# EAGLE board NSE2022_ROCKETCONTROLLER_ver0 (EAGLE 9.6.0)
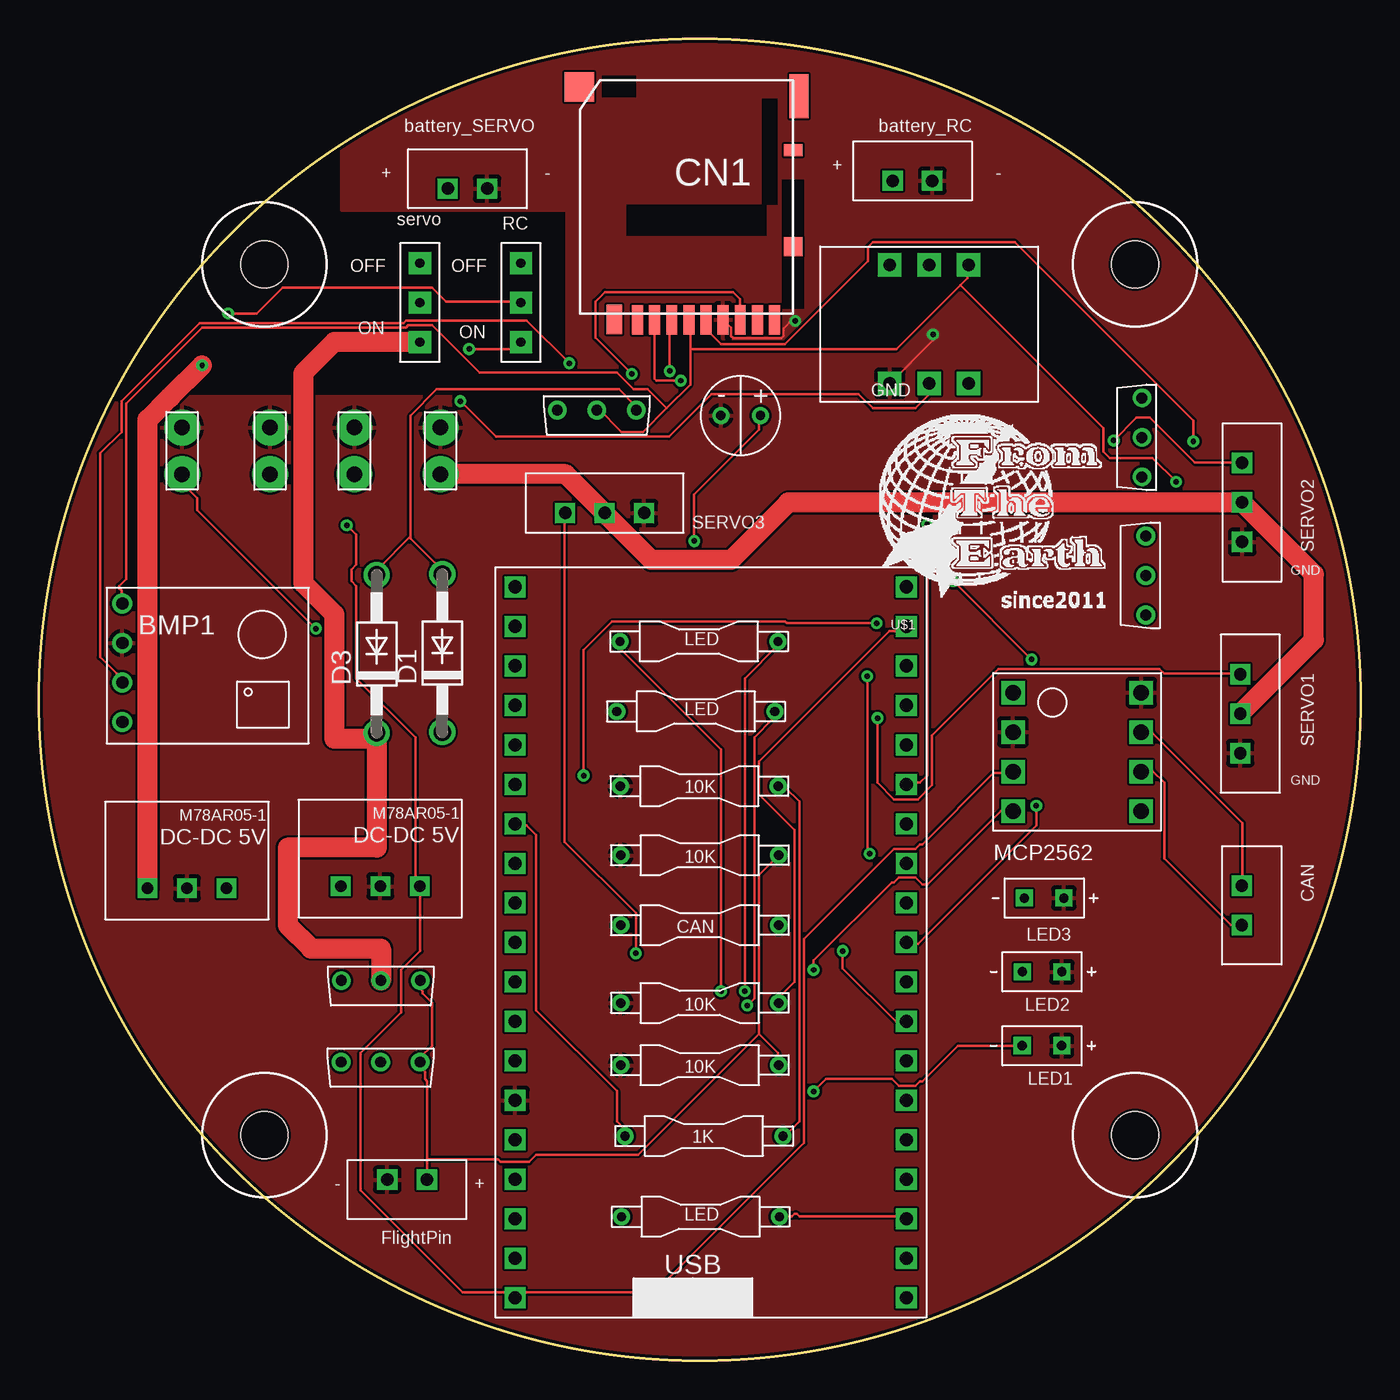
[diagram p0: board, top side]
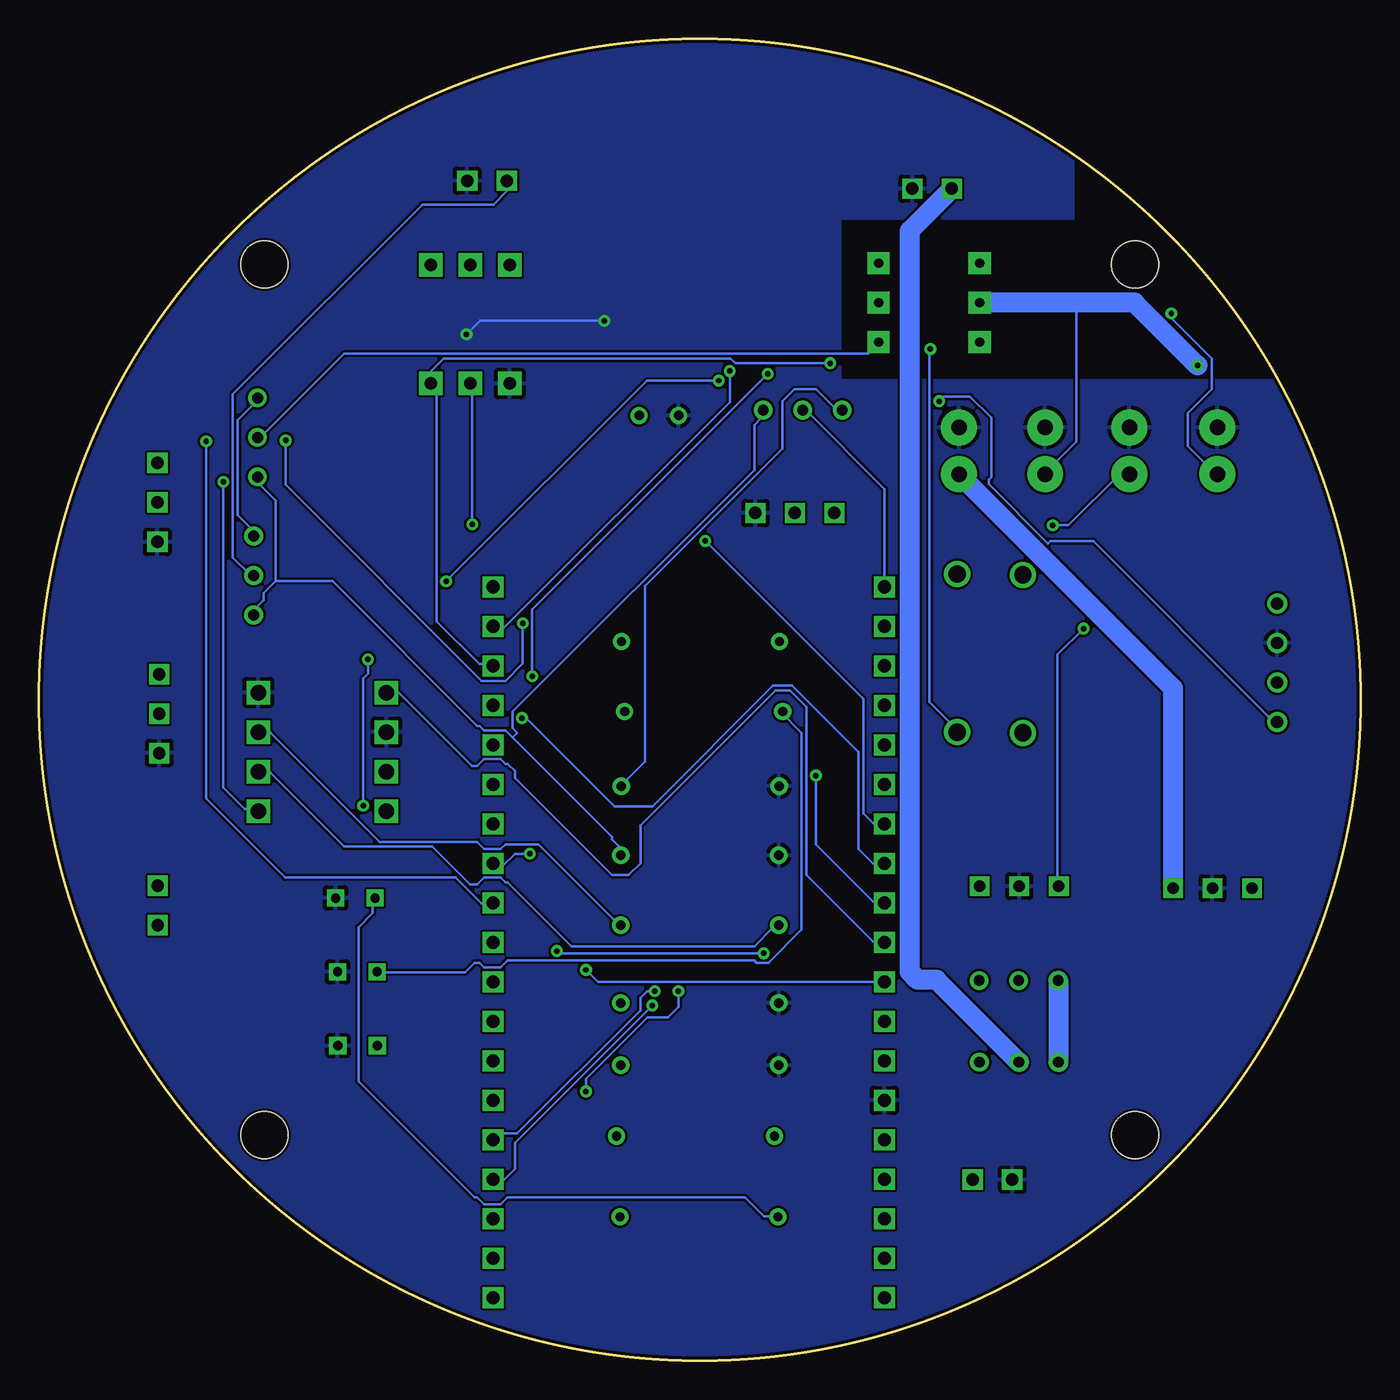
[diagram p1: board, bottom side, seen from below]

Size 85 x 85 mm. Coordinates in mm from the lower left corner, seen from the top.
Outline: circle at 42.5,42.5 radius 42.5
Copper layers (1*16): Top 0.035mm / dielectric 1.5mm / Bottom 0.035mm
Design rules "PCBGoGo": minimum track width 6mil, minimum drill 0.2mm, track to track 6mil, track to pad 6mil, pad to pad 6mil, via to via 6mil, smd to smd 6mil, copper to edge 0.2mm, drill to drill 6mil, minimum pad ring 10mil, minimum via ring 8mil, stop-mask expansion 4mil, vias tented up to drill 0mil, thermal gap 10mil
Holes 3 mm at 70.5,70.5 14.5,70.5 14.5,14.5 70.5,14.5

## Footprints (pad centres in the part's own frame; a part is rotated, then mirrored left to right if it is on the bottom)
GY-68 = drill 0.8: P1 -5,4; P2 -5,1.46; P3 -5,-1.08; P4 -5,-3.62
BMX055 = drill 0.8 pad 1.5 square: 3V3 8.81,-9.53; GND 1.19,-4.46; SCL 1.19,-9.53; SDA 1.19,-7; VCC 8.81,-4.46; VCCIO 8.81,-7
CAPACITOR-ELECTROLYTIC_1 = drill 0.6: AN -1.27,0; KS 1.27,0
CERAMIC_CAPACITOR = drill 1 pad 2.3: P$1 0,0; P$2 0,3
DM3AT = smd 0.7 x 1.9: CD/DAT3 2.2,6.4; CLK -1.1,6.4; CMD 1.1,6.4; DAT0 -3.3,6.4; DAT1 -4.4,6.4; DAT2 3.3,6.4; DET_B -5.5,6.4; VDD 0,6.4; VSS -2.2,6.4 | smd 1.2 x 0.8: DET_A -6.7,-4.5 | smd 1 x 1.9: P$9 4.8,6.381 | smd 1.2 x 1.2: P$11 -6.7,1.7 | smd 1.2 x 2.8: P$13 -7.081,-7.973 | smd 1.9 x 1.9: P$14 7.054,-8.562
DO41-10 = drill 1.118: A 5.08,0; C -5.08,0
REGISTER = drill 0.6: A -5.08,0; B 5.08,0
SLIDESWITCH = drill 0.6 pad 1.422 square: A 0,0; B 5.08,0; C 2.54,0
ESP32 = drill 0.85 square: 3.3V 1.27,46.99; 5V 1.27,1.27; EN 1.27,44.45; GND1 1.27,13.97; GND2 26.44,46.99; GND3 26.44,31.75; GPIO0 26.44,13.97; GPIO2 26.44,11.43; GPIO4 26.44,16.51; GPIO5 26.44,24.13; GPIO6 26.44,1.27; GPIO7 26.44,3.81; GPIO8 26.44,6.35; GPIO9 1.27,8.89; GPIO10 1.27,6.35; GPIO11 1.27,3.81; GPIO12 1.27,16.51; GPIO13 1.27,11.43; GPIO14 1.27,19.05; GPIO15 26.44,8.89; GPIO16 26.44,19.05; GPIO17 26.44,21.59; GPIO18 26.44,26.67; GPIO19 26.44,29.21; GPIO21 26.44,34.29; GPIO22 26.44,41.91; GPIO23 26.44,44.45; GPIO25 1.27,26.67; GPIO26 1.27,24.13; GPIO27 1.27,21.59; GPIO32 1.27,31.75; GPIO33 1.27,29.21; GPIO34 1.27,36.83; GPIO35 1.27,34.29; GPIO36 1.27,41.91; GPIO39 1.27,39.37; RX 26.44,36.83; TX 26.44,39.37
2SK4017 = drill 0.7: DRAIN 0,0; GATE 2.54,0; SOURCE -2.54,0
2SJ681 = drill 0.7: DRAIN 0,0; GATE 2.54,0; SOURCE -2.54,0
M78AR05-1 = drill 0.75 pad 1.27 square: GND 0,0; VIN 2.54,0; VOUT -2.54,0
2PIN = drill 0.8 square: PIN1 1.27,0; PIN2 3.81,0
MCP2562 = drill 1 square: CANH 8.255,6.35; CANL 8.255,3.81; RXD 0,1.27; STBY 8.255,8.89; TXD 0,8.89; VDD 0,3.81; VIO 8.255,1.27; VSS 0,6.35
3PIN = drill 0.8 square: PIN1 1.27,0; PIN2 3.81,0; PIN3 6.35,0
LED = drill 0.6 square: MINUS 1.27,0; PLUS 3.81,0

## Placement (x,y rotation side)
BMP1  BMP180  [GY-68]  10.36,44.69 0 top
BMX1  BMX055  [BMX055]  50.26,61.65 90 top
C1  [CAPACITOR-ELECTROLYTIC_1]  45.13,60.78 0 top
CERAMIC_CAPACITOR3  CERAMIC_CAPACITOR  [CERAMIC_CAPACITOR]  25.83,57.01 0 top
CERAMIC_CAPACITOR4  CERAMIC_CAPACITOR  [CERAMIC_CAPACITOR]  20.29,57.01 0 top
CERAMIC_CAPACITOR5  CERAMIC_CAPACITOR  [CERAMIC_CAPACITOR]  14.87,57.01 0 top
CERAMIC_CAPACITOR6  CERAMIC_CAPACITOR  [CERAMIC_CAPACITOR]  9.21,57.01 0 top
CN1  DM3AT  [DM3AT]  41.8,73.34 180 top
D1  1N4004  [DO41-10]  25.95,45.5 90 top
D3  1N4004  [DO41-10]  21.72,45.45 90 top
R2  [REGISTER]  42.5,32.5 0 top
R3  [REGISTER]  42.5,28 0 top
R4  [REGISTER]  42.5,23 0 top
R5  [REGISTER]  42.5,19 0 top
R9  [REGISTER]  42.47,36.94 0 top
R10  [REGISTER]  42.77,14.44 0 top
R12  [REGISTER]  42.45,46.25 0 top
R14  [REGISTER]  42.25,41.75 0 top
R15  [REGISTER]  42.55,9.25 0 top
U$1  F.T.E.LOGO  [LOGO]  53.5,47 0 top
U$2  SLIDESWITCH  [SLIDESWITCH]  31,65.5 90 top
U$3  SLIDESWITCH  [SLIDESWITCH]  24.5,65.5 90 top
U$4  ESP32  [ESP32]  29.36,2.77 0 top
U$8  2SK4017-NCH  [2SK4017]  35.88,61.13 0 top
U$12  2SJ681-PCH  [2SJ681]  21.99,24.44 0 top
U$13  2SJ681-PCH  [2SJ681]  21.97,19.19 0 top
U$14  M78AR05-1  [M78AR05-1]  9.52,30.38 180 top
U$18  2PIN  [2PIN]  77.36,31.82 270 top
U$19  2PIN  [2PIN]  26.21,11.64 180 top
U$20  2PIN  [2PIN]  53.65,75.88 0 top
U$21  2PIN  [2PIN]  25.02,75.37 0 top
U$27  [MCP2562]  62.64,34.07 0 top
U$30  2SJ681-PCH  [2SJ681]  71.19,50.5 270 top
U$31  2SJ681-PCH  [2SJ681]  70.94,59.37 270 top
U$32  M78AR05-1  [M78AR05-1]  21.95,30.51 180 top
U$42  3PIN  [3PIN]  77.26,45.42 270 top
U$43  3PIN  [3PIN]  77.38,59 270 top
U$44  3PIN  [3PIN]  32.57,54.51 0 top
U$63  LED  [LED]  61.97,20.25 0 top
U$64  LED  [LED]  61.98,25 0 top
U$69  LED  [LED]  62.11,29.75 0 top

## Library data of the parts
BMP1 = BMP180
BMX1 = BMX055
C1 = normal capacitor; F: 10uF
CERAMIC_CAPACITOR3-CERAMIC_CAPACITOR6 = capacitor
CN1 = microSD
D1 D3 = diode
R2-R5 R9 R12 R14 R15 = normal register; R: 10k
R10 = normal register; R: 1k
U$1 = logo
U$2 U$3 = SLIDESWITCH
U$4 = ESP32
U$8 U$12 U$13 U$30 U$31 = MOSFET
U$14 U$32 = M78AR05-1
U$18-U$21 = 2PIN
U$27 = MCP2562
U$42-U$44 = 3PIN
U$63 U$64 U$69 = LEDkato

## Nets
+3V3: BMP1.P1 BMX1.3V3 CN1.VDD U$4.3.3V U$8.DRAIN U$27.VIO
+5V: CERAMIC_CAPACITOR5.P$1 U$4.5V U$27.VDD U$32.VOUT
BATTE_RC: U$20.PIN1 U$30.DRAIN
BATTE_SERVO: U$13.DRAIN U$21.PIN1
CANH1: U$4.GPIO27 U$27.RXD
CANH1OUT: R3.B U$18.PIN1 U$27.CANH
CANL1: U$4.GPIO26 U$27.TXD
CANL1OUT: R3.A U$18.PIN2 U$27.CANL
FLIGHTPIN: C1.KS R10.A U$4.GPIO32
FP: D1.A D3.A R2.B R5.B U$8.GATE U$12.GATE U$13.GATE U$19.PIN1 U$30.GATE U$31.GATE
GND: BMP1.P2 BMX1.GND C1.AN CERAMIC_CAPACITOR3.P$2 CERAMIC_CAPACITOR4.P$2 CERAMIC_CAPACITOR5.P$2 CERAMIC_CAPACITOR6.P$2 CN1.VSS R2.A R4.A R5.A R9.A U$4.GND1 U$14.GND U$19.PIN2 U$20.PIN2 U$21.PIN2 U$27.STBY U$27.VSS U$32.GND U$42.PIN3 U$43.PIN3 U$44.PIN3 U$63.PLUS U$64.PLUS U$69.PLUS
IMBUSY: U$4.GPIO14
LED1: R12.B U$4.GPIO2
LED2: R14.B U$4.GPIO15
LED3: R15.B U$4.GPIO8
MISO: CN1.DAT0 U$4.GPIO19
MOSI: CN1.CMD R4.B U$4.GPIO23
N$1: U$4.GND2
N$2: U$12.SOURCE U$13.SOURCE
N$5: R9.B R10.B U$8.SOURCE
N$6: CERAMIC_CAPACITOR4.P$1 U$3.C U$14.VIN
N$10: D1.C U$2.A U$31.DRAIN
N$11: D3.C U$3.A U$12.DRAIN
N$15: R12.A U$63.MINUS
N$16: R14.A U$64.MINUS
N$17: R15.A U$69.MINUS
N$22: U$30.SOURCE U$31.SOURCE
N$24: CERAMIC_CAPACITOR6.P$1 U$2.C U$32.VIN
OFFPIN: U$4.GPIO12
SCK: CN1.CLK U$4.GPIO18
SCL: BMP1.P3 BMX1.SCL U$4.GPIO22
SDA: BMP1.P4 BMX1.SDA U$4.GPIO21
SERVO1: U$4.GPIO33 U$42.PIN1
SERVO2: U$4.GPIO25 U$43.PIN1
SERVO3: U$4.GPIO16 U$44.PIN1
SERVO4: U$4.GPIO4
SERVO5V: CERAMIC_CAPACITOR3.P$1 U$14.VOUT U$42.PIN2 U$43.PIN2 U$44.PIN2
SS: CN1.CD/DAT3 U$4.GPIO5
VCC: BMX1.VCC
VCCIO: BMX1.VCCIO

## Tracks (layer width: path | path; a pad name or v marks a point on that pad's centre or on a via)
+3V3  (via drill 0.35)
  Top 0.152: 41.89,65.06 41.89,62.77 40.37,61.25 | 41.89,65.06 41.89,66.88 CN1.VDD | 40.37,61.25 38.84,59.72 37.47,59.72 35.95,61.25 U$8.DRAIN | 40.37,61.25 39.15,62.46 38.23,62.46 37.17,63.53 28.33,63.53 25.28,66.58 23.75,66.58 23.6,66.43 10.5,66.43 5.62,61.55 5.62,50.27 5.16,49.81 5.16,49.66 5.31,49.51 5.31,48.75 BMP1.P1 | 59.26,69.17 55.15,65.06 41.89,65.06 | 59.26,69.17 59.72,69.63 59.72,70.39 BMX1.3V3 | v73.13,56.52 71.61,58.05 68.89,58.05 68.47,58.47 68.47,59.97 59.26,69.17
  Bottom 0.152: U$4.3.3V 30.61,49.81 30.61,56.06 35.79,61.25 U$8.DRAIN | v73.13,56.52 73.13,36.86 71.76,35.49 71,35.49 U$27.VIO
+5V  (via drill 0.35)
  Top 0.152: U$27.VDD 62.62,37.78 61.4,37.78 56.83,33.2 56.67,33.2 56.37,32.9 55,32.9 49.21,27.11 49.21,14 39.6,4.4 31.07,4.4 30.77,4.09 U$4.5V 30.61,4.09 30.31,4.4 27.26,4.4 20.71,10.95 20.71,19.79 23.3,22.38 23.3,25.13 24.52,26.35 24.52,30.46 U$32.VOUT 24.36,30.61 24.21,30.77 24.21,40.06 20.4,43.87 20.4,49.81 20.1,50.12 20.1,50.88 20.4,51.19 20.4,53.12 v19.8,53.72
  Bottom 0.152: v19.8,53.72 18.78,53.72 15.52,56.98 14.92,56.98 CERAMIC_CAPACITOR5.P$1
BATTE_RC
  Bottom 0.152: U$30.DRAIN 71.3,50.58 71.46,50.58 72.52,51.64 72.52,62.16 60.33,74.35 55.76,74.35 54.84,75.27 54.84,75.88 U$20.PIN1
BATTE_SERVO
  Bottom 1.27: U$13.DRAIN 27.28,24.5 28.5,24.5 29,25 29,72.66 U$21.PIN1
CANH1  (via drill 0.35)
  Top 0.152: v49.81,25.13 49.81,25.74 54.84,30.77 55,30.77 55.3,31.07 56.37,31.07 56.83,30.61 57.13,30.61 61.86,35.34 62.62,35.34 U$27.RXD
  Bottom 0.152: v49.81,25.13 49.05,24.36 30.77,24.36 U$4.GPIO27
CANH1OUT
  Top 0.152: U$18.PIN1 77.4,30.61 77.4,34.58 71.61,40.37 71,40.37 U$27.CANH
  Bottom 0.152: R3.B 47.68,28.02 52.86,33.2 55,33.2 55.3,32.9 56.37,32.9 56.83,33.36 63.07,33.36 70.08,40.37 70.85,40.37 U$27.CANH
CANL1
  Bottom 0.152: U$4.GPIO26 30.77,26.95 31.38,26.95 35.64,31.22 35.64,42.04 36.71,43.11 37.62,43.11 46.31,34.42 46.31,31.98 47.07,31.22 48.14,31.22 54.39,37.47 54.39,37.93 54.84,38.38 55,38.38 55.3,38.69 56.37,38.69 56.83,38.23 57.13,38.23 61.86,42.96 62.62,42.96 U$27.TXD
CANL1OUT
  Top 0.152: U$18.PIN2 77.25,28.02 76.64,28.02 72.37,32.29 72.37,37.17 71.61,37.93 71,37.93 U$27.CANL
  Bottom 0.152: R3.A 37.47,27.87 37.78,27.87 38.99,26.65 50.73,26.65 54.84,30.77 55,30.77 55.3,31.07 56.37,31.07 56.83,30.61 57.28,30.61 59.72,33.05 65.36,33.05 70.08,37.78 70.85,37.78 U$27.CANL
FLIGHTPIN  (via drill 0.35)
  Top 0.152: R10.A 37.62,14.46 37.62,14.92 37.17,15.37 37.17,17.35 31.98,22.54 31.98,33.81 31.38,34.42 30.77,34.42 U$4.GPIO32 | v42.15,52.71 42.15,55.71 46.31,59.87 46.31,60.64 C1.KS
  Bottom 0.152: v42.15,52.71 31.98,42.55 31.98,35.19 31.38,34.58 30.77,34.58 U$4.GPIO32
FP
  Top 0.152: 23.91,53.02 23.91,52.86 26.04,50.73 D1.A | 23.91,53.02 23.91,60.79 25.58,62.46 37.32,62.46 38.38,61.4 38.38,61.25 U$8.GATE | 23.91,53.02 21.77,50.88 21.77,50.58 D3.A | U$12.GATE 24.52,24.36 24.52,23.91 24.67,23.75 24.67,23.6 25.28,22.99 25.28,20.25 24.52,19.49 24.52,19.34 U$13.GATE 24.52,18.88 24.82,18.57 24.82,18.12 24.97,17.96 24.97,12.93 | 24.97,12.93 24.97,11.71 U$19.PIN1 | 46.31,21.01 47.53,19.79 47.53,19.03 R5.B | 46.31,21.01 46.31,31.22 47.53,32.44 R2.B | 24.97,12.93 29.55,12.93 29.7,12.78 31.53,12.78 31.98,13.24 38.54,13.24 46.31,21.01
  Bottom 0.152: 69.78,50.12 70.54,49.36 70.54,48.9 71.15,48.29 71.15,47.99 U$30.GATE | 69.78,50.12 69.78,55.3 70.85,56.37 70.85,56.83 U$31.GATE | 69.78,50.12 66.12,50.12 56.83,40.82 56.67,40.82 56.37,40.52 55,40.52 54.54,40.06 | 54.54,40.06 48.14,33.66 48.14,33.51 47.68,33.05 47.68,32.59 R2.B | 54.54,40.06 54.23,40.37 54.54,40.67 54.54,41.74 38.99,57.28 38.99,60.18 38.54,60.64 38.54,61.09 U$8.GATE
GND  (via drill 0.35)
  Top 0.152: CN1.VSS 44.52,66.42 44.52,65.89 44.66,65.76 47.74,65.76 47.88,65.89 47.88,66.38 48.5,67 v48.63,66.87 | v57.5,66 57.5,65.62 BMX1.GND
  Bottom 0.152: v48.63,66.87 56.63,66.87 v57.5,66
  pour Bottom: 4,63 33.5,63 33.5,73.5 18.5,73.5 18.5,86.5 93.5,86.5 93.5,-3 -1.5,-3 -1.5,63
  pour Top: -2.5,62 34,62 34,74 19.5,74 19.5,87.5 95,87.5 95,-4.5 -2.5,-4.5
LED1  (via drill 0.35)
  Top 0.152: v45.4,23.75 45.4,43.87 47.53,46.01 47.53,46.16 R12.B
  Bottom 0.152: v45.4,23.75 45.9,23.75 46.31,23.34 46.31,22.54 54.23,14.61 55.45,14.61 55.76,14.31 U$4.GPIO2
LED2  (via drill 0.35)
  Top 0.152: v45.55,22.84 46.01,23.29 46.01,40.06 47.22,41.28 47.22,41.74 R14.B
  Bottom 0.152: v45.55,22.84 54.39,14 54.39,12.32 55.15,11.56 55.76,11.56 U$4.GPIO15
LED3
  Top 0.152: R15.B 47.68,9.28 48.44,9.28 48.6,9.43 48.75,9.43 48.9,9.28 55.61,9.28 55.76,9.12 U$4.GPIO8
MISO  (via drill 0.35)
  Top 0.152: v38.13,63.45 35.79,65.79 35.79,68.1 36.4,68.71 44.63,68.71 45.09,68.26 45.09,67.04 CN1.DAT0 | v53.27,44.01 53.27,32.75 v53.43,32.59
  Bottom 0.152: v38.13,63.45 53.27,48.32 v53.27,44.01 | v53.43,32.59 54.39,32.59 55.15,31.83 55.76,31.83 U$4.GPIO19
MOSI  (via drill 0.35)
  Top 0.152: CN1.CMD 40.57,66.81 v40.57,63.64 | R4.B 47.68,23.14 47.68,23.45 48.6,24.36 48.6,34.12 46.31,36.4 46.31,38.54 54.69,46.92 55.61,46.92 55.76,47.07 U$4.GPIO23
  Bottom 0.152: v40.57,63.64 40.57,61.65 55.15,47.07 55.76,47.07 U$4.GPIO23
N$2
  Bottom 1.27: U$12.SOURCE 19.45,19.21 U$13.SOURCE
N$5
  Top 0.152: R9.B 47.68,36.86 47.99,36.86 48.9,35.95 48.9,15.37 47.99,14.46 R10.B
  Bottom 0.152: U$8.SOURCE 33.36,61.25 33.81,61.25 35.03,62.46 36.4,62.46 37.17,61.7 37.17,58.65 46.01,49.81 46.01,38.54 47.53,37.01 R9.B
N$6  (via drill 0.35)
  Top 1.27: v10.5,64 8.45,61.95 8.41,61.95 6.98,60.52 U$14.VIN
  Bottom 0.152: 18.27,68.04 18.27,59.11 20.25,57.13 CERAMIC_CAPACITOR4.P$1
  Bottom 1.27: v10.5,64 14.54,68.04 18.27,68.04 U$3.C
N$10  (via drill 0.35)
  Top 0.152: v27.67,65.05 30.61,65.05 30.92,65.36 U$2.A
  Bottom 0.152: U$31.DRAIN 70.85,59.42 70.69,59.42 65.36,64.75 31.68,64.75 31.07,65.36 U$2.A | v27.67,65.05 27.72,65 27.72,42.35 26.35,40.98 26.35,40.82 26.04,40.52 D1.C
N$11
  Top 1.27: U$3.A 19,65.5 17,63.5 17,50 19,48 19,40 21.72,40 D3.C 21.72,33 16,33 16,28 17.5,26.5 22,26.5 U$12.DRAIN
N$15  (via drill 0.35)
  Top 0.152: v49.81,17.31 50.62,18.12 54.84,18.12 55.3,17.66 56.37,17.66 56.67,17.96 56.83,17.96 59.11,20.25 63.23,20.25 U$63.MINUS | v43.87,23.75 43.87,39.3 37.47,45.7 37.47,46.16 R12.A
  Bottom 0.152: v49.81,17.31 49.81,18.12 45.85,22.08 44.55,22.08 43.87,22.75 v43.87,23.75
N$16
  Bottom 0.152: U$64.MINUS 63.23,24.97 57.59,24.97 56.98,25.58 56.67,25.58 56.37,25.28 55.3,25.28 54.84,25.74 38.99,25.74 38.84,25.58 38.08,25.58 35.95,27.72 35.95,40.37 37.32,41.74 R14.A
N$17
  Bottom 0.152: R15.A 37.47,9.28 38.38,9.28 39.6,10.5 54.84,10.5 55.3,10.04 56.37,10.04 56.83,10.5 56.98,10.5 64.45,17.96 64.45,27.87 63.53,28.78 63.53,29.7 U$69.MINUS
N$22
  Bottom 0.152: U$30.SOURCE 71.3,53.17 71.3,53.47 72.22,54.39 72.22,60.48 70.85,61.86 U$31.SOURCE
N$24  (via drill 0.35)
  Top 0.152: v17.81,47.07 10.19,54.69 10.19,55.45 9.28,56.37 9.28,56.98 CERAMIC_CAPACITOR6.P$1 | v12.17,67.34 14,67.34 15.68,69.02 25.28,69.02 26.19,68.1 30.92,68.1 U$2.C
  Bottom 0.152: v17.81,47.07 19.49,45.4 19.49,30.61 U$32.VIN | v12.17,67.34 12.17,67.04 9.58,64.45 9.58,62.46 11.11,60.94 11.11,58.81 9.28,56.98 CERAMIC_CAPACITOR6.P$1
SCK  (via drill 0.35)
  Top 0.152: v74.24,59.11 74.24,60.44 62.77,71.91 53.62,71.91 53.32,71.61 53.32,70.69 47.99,65.36 43.87,65.36 42.96,66.27 42.96,66.88 CN1.CLK
  Bottom 0.152: v74.24,59.11 74.24,36.14 69.17,31.07 58.2,31.07 56.52,29.39 55.91,29.39 U$4.GPIO18
SCL  (via drill 0.35)
  Top 0.152: v34.12,64.14 31.38,66.88 23.6,66.88 23.45,66.73 10.34,66.73 5.31,61.7 5.31,59.72 3.94,58.35 3.94,45.24 5.01,44.18 5.01,44.02 5.31,43.72 BMP1.P3
  Bottom 0.152: v34.12,64.14 40.21,64.14 40.52,64.45 58.96,64.45 59.87,63.53 59.87,62.92 BMX1.SCL 59.72,62.77 59.42,62.46 59.42,47.53 56.67,44.79 55.91,44.79 U$4.GPIO22
SDA  (via drill 0.35)
  Top 0.152: v27.11,61.7 29.39,59.42 40.52,59.42 43.26,62.16 52.71,62.16 53.62,61.25 56.37,61.25 57.28,62.16 57.28,62.77 BMX1.SDA | v57.13,53.78 57.13,37.62 56.67,37.17 55.91,37.17 U$4.GPIO21
  Bottom 0.152: v27.11,61.7 26.8,62.01 25.13,62.01 23.75,60.64 23.75,56.83 23.91,56.67 23.91,56.37 20.1,52.56 19.95,52.71 17.2,52.71 5.92,41.43 5.77,41.43 5.47,41.13 BMP1.P4 | v57.13,53.78 57.13,62.77 BMX1.SDA
SERVO1  (via drill 0.35)
  Top 0.152: v53.93,41.32 53.93,37.17 55,36.1 56.52,36.1 57.44,37.01 57.44,40.21 61.7,44.48 72.07,44.48 72.37,44.18 77.25,44.18 U$42.PIN1
  Bottom 0.152: v53.93,41.32 53.67,41.32 47.99,35.64 45.55,35.64 37.78,43.41 36.56,43.41 32.29,39.15 32.29,32.9 31.38,31.98 30.77,31.98 U$4.GPIO33
SERVO2  (via drill 0.35)
  Top 0.152: v69.12,59.17 70.59,60.64 71.46,60.64 74.35,57.74 77.25,57.74 U$43.PIN1 | v53.88,47.42 48.1,47.42 47.99,47.53 36.86,47.53 35.03,45.7 v35.03,37.62
  Bottom 0.152: v69.12,59.17 69.12,56.32 56.52,43.72 55,43.72 53.88,44.84 v53.88,47.42 | v35.03,37.62 35.03,33.2 31.38,29.55 30.77,29.55 U$4.GPIO25
SERVO3  (via drill 0.35)
  Top 0.152: v38.39,26.19 38.39,28.78 33.81,33.36 33.81,54.39 U$44.PIN1 | v51.69,26.35 51.69,25.24 55.15,21.77 55.76,21.77 U$4.GPIO16
  Bottom 0.152: v38.39,26.19 51.84,26.19 v51.69,26.35
SERVO5V
  Top 1.27: U$42.PIN2 82,46.34 82,50.57 U$43.PIN2 48.19,55.19 44.5,51.5 39.39,51.5 U$44.PIN2 33.88,57.01 CERAMIC_CAPACITOR3.P$1
  Bottom 1.27: CERAMIC_CAPACITOR3.P$1 12.06,43.24 U$14.VOUT
SS  (via drill 0.35)
  Top 0.152: v41.28,63.02 39.72,63.02 39.6,63.14 39.6,66.88 CN1.CD/DAT3 | v63.84,45.09 v58.81,50.12 | v64.14,35.69 64.14,34.42 56.52,26.8 55.91,26.8 U$4.GPIO5
  Bottom 0.152: v41.28,63.02 45.9,63.02 v58.81,50.12 | v63.84,45.09 63.84,44.18 64.14,43.87 v64.14,35.69

## Text on the board
tPlace: battery_SERVO | battery_RC | + | - | + | - | servo | RC | OFF | OFF | ON | ON | GND | SERVO3 | SERVO2 | GND | LED | LED | SERVO1 | 10K | GND | 10K | CAN | CAN | LED3 | 10K | LED2 | 10K | LED1 | 1K | - | + | LED | FlightPin